# Altium PCB SoundAmplify.PcbDoc
Units mil, origin at the board's own origin, x right, y up, seen from the top; angles counter-clockwise.
Board outline 1709.68 x 3528 mil, 2 copper layers (Top Layer, Bottom Layer); 52 components, 24 nets, 143 pads, 96 vias.
Unrouted connection lines stored in the file: 43.
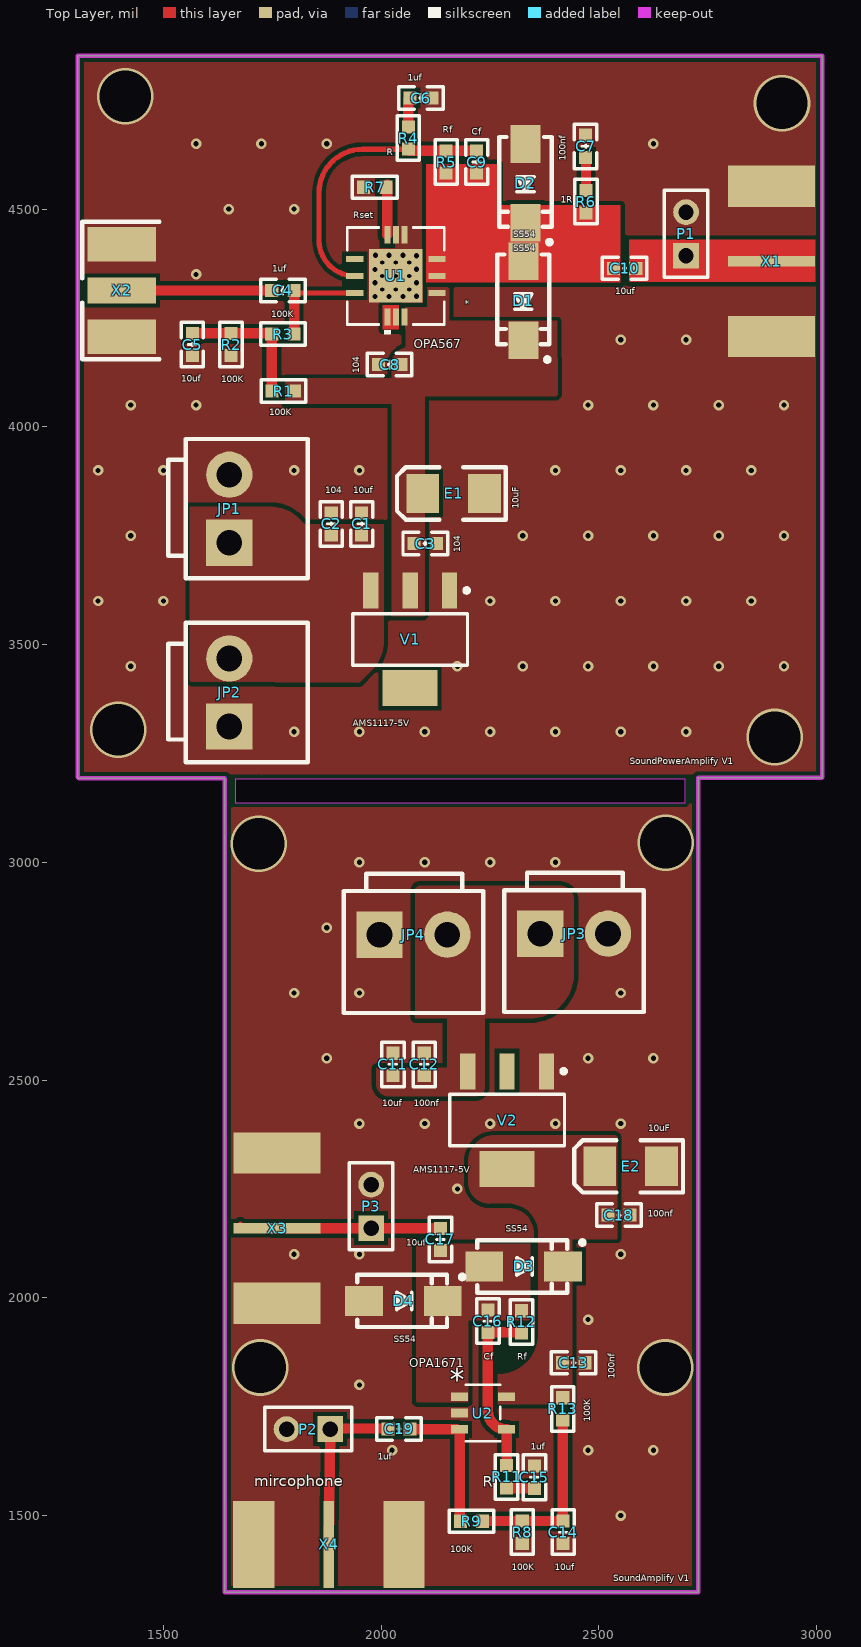
[diagram p0: Top Layer view]
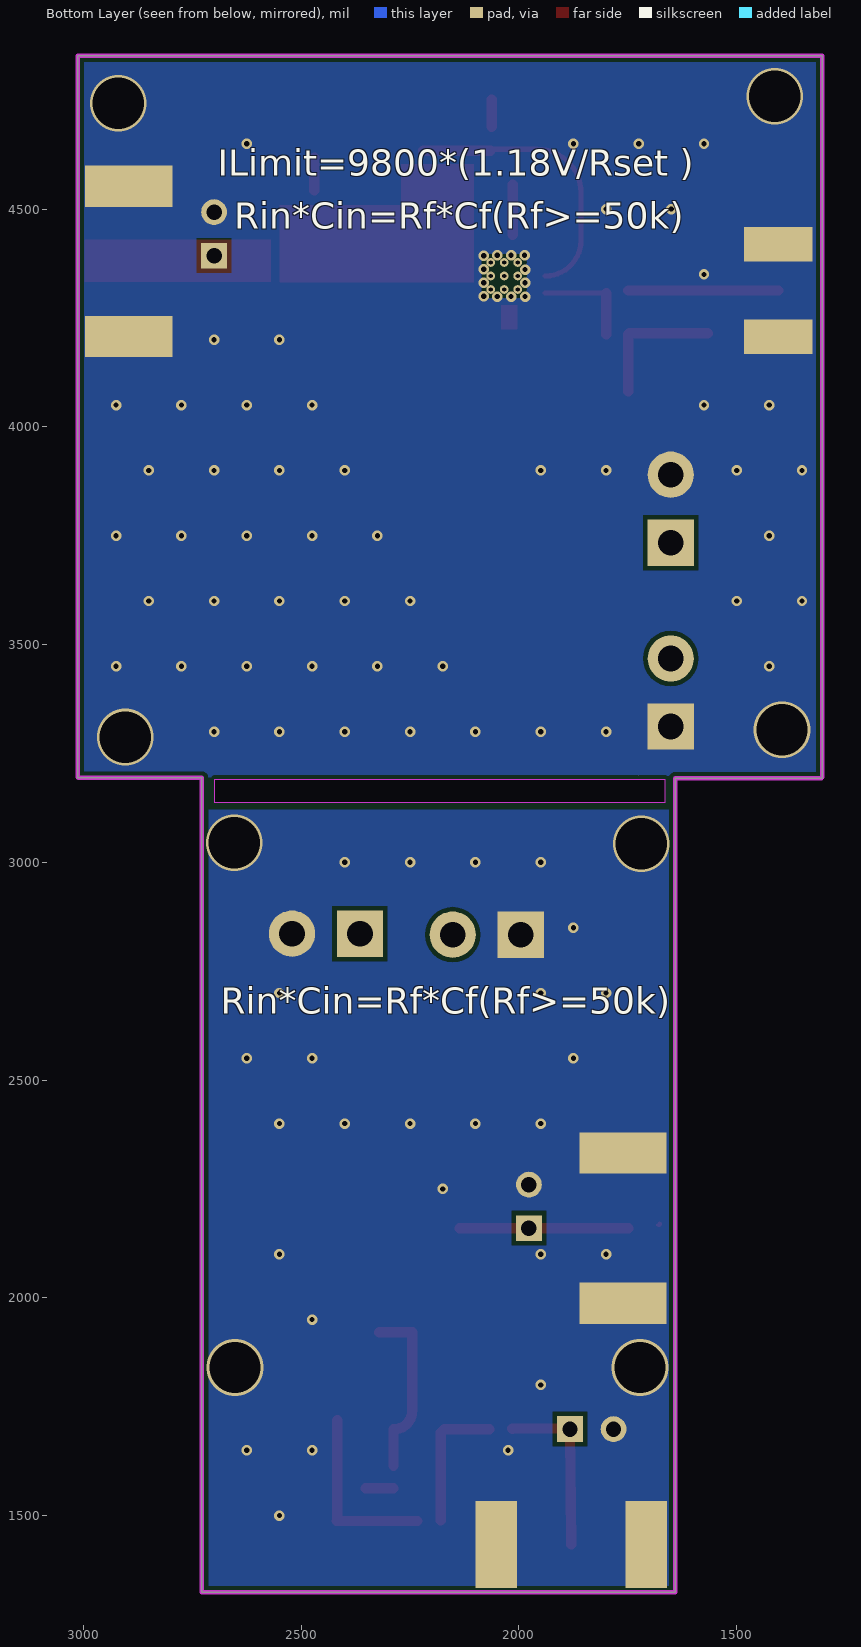
[diagram p1: Bottom Layer view, seen from below]
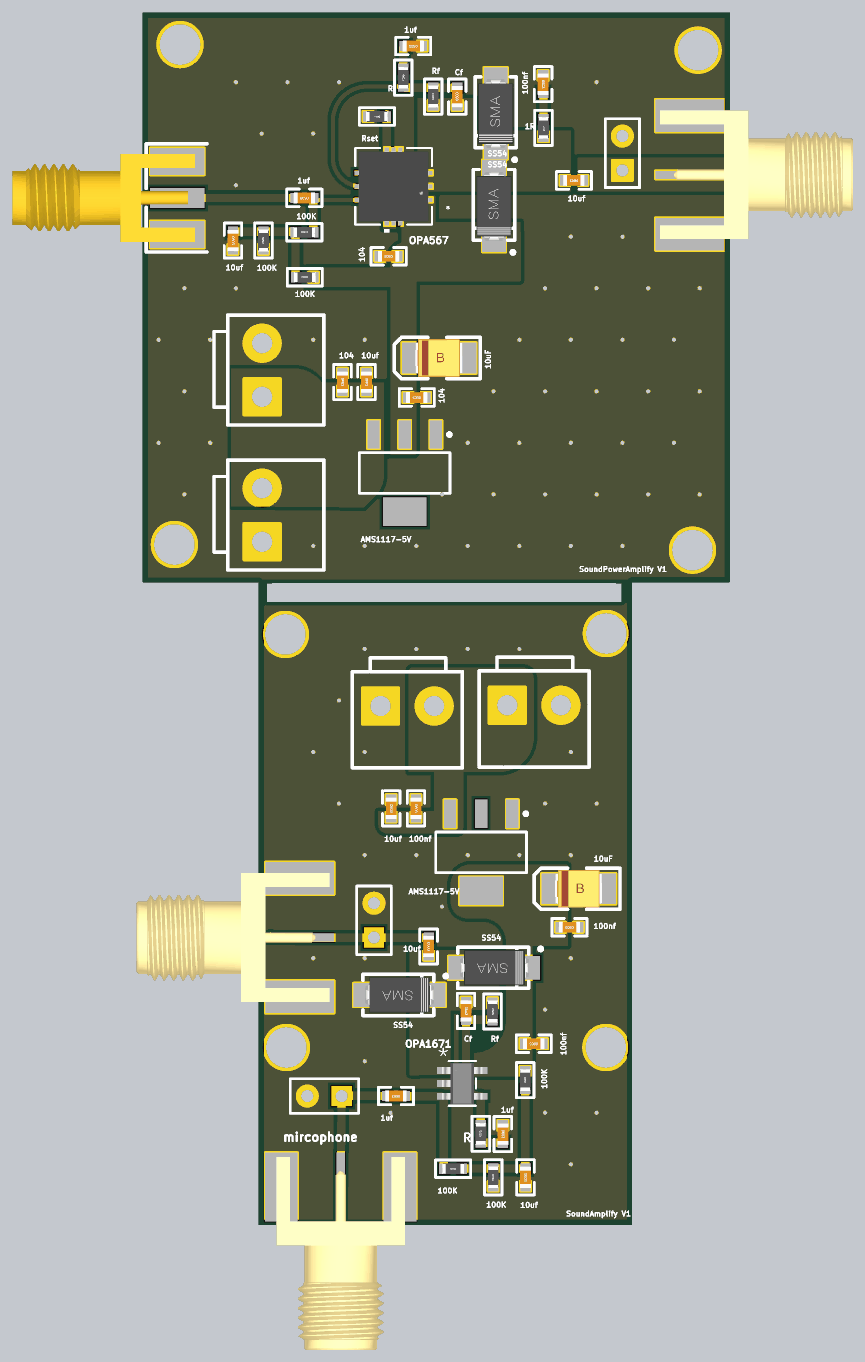
[diagram p2: 3D render of the assembled board from above, using the file's embedded part models]

## Layer stack, top to bottom
Top Solder: solder mask 0.4, Solder Resist, Dk 3.5
Top Layer: signal copper 1.4
Dielectric 1: dielectric 12.6, FR-4, Dk 4.8
Bottom Layer: signal copper 1.4
Bottom Solder: solder mask 0.4, Solder Resist, Dk 3.5

## Board outline
1641,3121 1641,3193 1305.32,3193 1303.32,3195 1303.32,4852 3013,4852 3013,3195 3012,3194 2728,3194 2728,3121 2728,1324 1641,1324
cut-out: 1665,3190.47 1665,3137 2698,3137 2698,3190.47
cut-out: 1726,3200

## Design rules (kind name [scope] priority, off if disabled: settings)
Clearance [All] p1: gap=10 ignorepadtopadclearanceinfootprint=FALSE except(0: Arc-Hole Track-Hole SMDPad-Hole THPad-Hole Via-Hole Fill-Hole Poly-Hole Region-Hole Text-Hole)
PlaneClearance [All] p1: clearance=15
PlaneConnect [All] p1: planeconnectstyle=Direct reliefexpansion=20 reliefentries=4 reliefconductorwidth=10 reliefairgap=10
PolygonConnect [All] p1: connectstyle=Direct reliefconductorwidth=10 reliefentries=4 polygonreliefangle="90 Angle" airgapwidth=10
RoutingVias [All] p1: holewidth=28 width=50 viastyle="Through Hole" minholewidth=28 minwidth=50 maxholewidth=28 maxwidth=50
SolderMaskExpansion [All] p1: expansion=4
Width [All] p1: maxlimit=10 minlimit=10 preferedwidth=10
28 further rules are at their usual default settings.

## Classes and differential pairs
component class OPA1671: C11 C12 C13 C14 C15 C16 C17 C18 C19 D3 D4 E2 JP3 JP4 P2 P3 R8 R9 R11 R12 R13 U2 V2 X3 X4
component class OPA567: C1 C2 C3 C4 C5 C6 C7 C8 C9 C10 D1 D2 E1 JP1 JP2 P1 R1 R2 R3 R4 R5 R6 R7 U1 V1 X1 X2

## Components (designator, comment, footprint, x,y, rotation, side; value= is the part's Value field where it differs from the comment)
C1 "10uf" "C 0603_L" 1955.32,3777 r270 top
C2 "104" "C 0603_L" 1885.32,3777 r270 top
C3 "104" "C 0603_L" 2101.32,3732 r180 top
C4 "1uf" "C 0603_L" 1774.32,4313 r180 top
C5 "10uf" "C 0603_L" 1566.32,4189 r270 top
C6 "1uf" "C 0603_L" 2091.32,4755 r180 top
C7 "100nf" "C 0603_L" 2469.32,4644 r270 top
C8 "104" "C 0603_L" 2019.32,4143 r180 top
C9 "Cf" "C 0603_L" 2219.32,4608 r90 top
C10 "10uf" "C 0603_L" 2559,4364 r180 top
C11 "10uf" "C 0603_L" 2027,2536 r270 top
C12 "100nf" "C 0603_L" 2099,2536 r270 top
C13 "100nf" "C 0603_L" 2442,1851 r180 top
C14 "10uf" "C 0603_L" 2418.01,1462 r270 top
C15 "1uf" "C 0603_L" 2352,1588 r270 top
C16 "Cf" "C 0603_L" 2245,1946.41 r270 top
C17 "10uf" "C 0603_L" 2136,2134 r270 top
C18 "100nf" "C 0603_L" 2546,2190 r180 top
C19 "1uf" "C 0603_L" 2041,1699 r180 top
D1 "SS54" SMA 2326.32,4289.45 r270 top
D2 "SS54" SMA 2331.32,4559 r270 top
D3 "SS54" SMA 2327,2072 r0 top
D4 "SS54" SMA 2051,1993 r0 top
E1 "10uF" "CD B(3528)" 2166.32,3847 r0 top
E2 "10uF" "CD B(3528)" 2573,2302 r0 top
JP1 "HDR-1X2" VH3.96-LI-2P 1651.32,3812 r90 top
JP2 "HDR-1X2" VH3.96-LI-2P 1651.32,3389.95 r90 top
JP3 "HDR-1X2" VH3.96-LI-2P 2442.95,2836.22 r0 top
JP4 "HDR-1X2" VH3.96-LI-2P 2073.95,2834 r0 top
P1 "Header 2" HDR1X2 2700,4393 r90 top
P2 "mircophone" HDR1X2 1882.79,1698.63 r180 top
P3 "Header 2" HDR1X2 1977,2160 r90 top
R1 "100K" "R 0603_L" 1775.32,4082 r0 top
R2 "100K" "R 0603_L" 1655.32,4189.01 r90 top
R3 "100K" "R 0603_L" 1774.33,4213 r0 top
R4 "R" "R 0603_L" 2062.32,4663 r270 top
R5 "Rf" "R 0603_L" 2149.32,4608 r90 top
R6 "1R" "R 0603_L" 2470.32,4517 r270 top
R7 "Rset" "R 0603_L" 1985.32,4550 r180 top
R8 "100K" "R 0603_L" 2324,1462 r90 top
R9 "100K" "R 0603_L" 2207.41,1487 r180 top
R11 "R" "R 0603_L" 2288,1589 r90 top
R12 "Rf" "R 0603_L" 2322,1944.82 r270 top
R13 "100K" "R 0603_L" 2417,1745 r90 top
U1 "OPA567" RHG12_3P12X3P12 2033.84,4346.37 r180 top
U2 "OPA1671" SOT23-DBV5_TEX 2233.75,1735.4 r0 top
V1 "AMS1117-5V" SOT223_L 2066.32,3512 r270 top
V2 "AMS1117-5V" SOT223_L 2289,2408 r270 top
X1 "SMA" SMA1 2896,4380 r180 top
X2 "SMA" SMA-KE 1404.32,4313 r90 top
X3 "SMA" SMA1 1761,2160 r0 top
X4 "SMA" SMA1 1880,1434 r90 top

## Footprints (in the part's own frame and the unit in brackets; to place one, negate y for a bottom-side part, rotate by r counter-clockwise, add the part's x,y. Pads: shape width x height; smd on the part's side, far side on the other; paste and mask are expansions set on the pad)
"C 0603_L" [mil] "无极性贴片电容"
  rect 30x30 smd: 1(-25.59,0) 2(25.59,0)
  silkscreen extent -51,-26 51,26, body extent -31,-16 31,16, height 32
"CD B(3528)" [mil] "长3.5mm，宽2.8mm，厚1.9mm"
  rect 75x90 smd: 1(-70.87,-0.01) 2(70.86,-0.01)
  silkscreen extent -130,-60 120,60, body extent -69,-55 69,55, height 75
HDR1X2 [mm] "Connector; Header; 2 Position"
  rect 1.5x1.5 hole 0.9: 1(0,0)
  round 1.5 hole 0.9: 2(2.54,0)
  silkscreen extent -1.27,-1.27 3.81,1.27
"R 0603_L" [mil] "1/10W贴片电阻"
  rect 30x30 smd: 1(-25.59,0) 2(25.59,0)
  silkscreen extent -51,-26 51,26, body extent -31,-16 32,16, height 16
RHG12_3P12X3P12 [mm]
  rect 1x0.35 smd paste-0.175: 1(-2.4,1) 2(-2.4,0) 3(-2.4,-1) 7(2.4,-1) 8(2.4,0) 9(2.4,1)
  rect 0.35x1 smd paste-0.175: 4(-0.5,-2.4) 5(0,-2.4) 6(0.5,-2.4) 10(0.5,2.4) 11(0,2.4) 12(-0.5,2.4)
  rect 3.12x3.12 smd paste-1.547 mask-1.549: 13(0,0)
  round 0.508 hole 0.254: V(-0.787,0.787) V(-0.787,0) V(-0.787,-0.787) V(0,0.787) V(0,0) V(0,-0.787) V(0.787,0.787) V(0.787,0) V(0.787,-0.787)
  silkscreen extent -2.83,-2.83 2.83,3.41, body extent -2.63,-2.63 2.63,2.63, height 1
SMA [mm] "4.5x2.6*2.2mm（长宽高，不包括引脚）"
  rect 2.2x1.75 smd: 1(-2.3,0) 2(2.3,0)
  silkscreen extent -2.7,-1.52 3.56,1.52, body extent -2.53,-1.3 2.58,1.3, height 2.15
SMA1 [mil]
  rect 200x24 smd: 1(0,0)
  rect 200x95 smd: 2(0,172.5) 2(0,-172.5)
  rect 200x95 smd far side: 2(0,172.5) 2(0,-172.5)
  body extent -475,-187 87,187, height 171
SMA-KE [mm] "SMA 偏脚射频天线座"
  rect 1.5x4 smd: 1(0,0)
  rect 2x4 smd: 2(-2.7,0) 2(2.7,0)
  rect 2x4 smd far side: 3(-2.7,0) 3(2.7,0)
  silkscreen extent -4,-2.2 4,2.3, body extent -3.25,-1.3 3.25,12.2, height 3.75
SOT23-DBV5_TEX [mil]
  rect 38.5x20 smd paste+0 mask+0: 1(-53.75,37.4) 2(-53.75,0) 3(-53.75,-37.4) 4(53.75,-37.4) 5(53.75,37.4)
  silkscreen extent -40,-65 40,65, body extent -59,-60 59,60, height 57
SOT223_L [mm] "SOT223, 4-Leads, Body 6.5x3.5mm, Pitch 2.3mm, Lead Span 7mm, IPC High Density"
  rect 2.1x0.9 smd: 1(-2.85,2.3) 2(-2.85,0) 3(-2.85,-2.3)
  rect 2.1x3.2 smd: 4(2.85,0)
  silkscreen extent -2.97,-3.35 1.5,3.43, body extent -1.85,-3.35 1.85,3.35, height 1.7
VH3.96-LI-2P [mm] "接插件，25V/5A"
  rect 2.7x2.7 hole 1.5: 1(-1.98,0)
  round 2.7 hole 1.5: 2(1.982,0)
  silkscreen extent -4.06,-4.57 4.07,3.56, body extent -3.98,-4.4 4.03,4.16, height 10.5

## Part data
C1 C2 C3 C4 C5 C6 C7 C8 C9 C10 C11 C12 C13 C14 C15 C16 C17 C18 C19: library part C, "无极性贴片电容", BOM名称=无极性, 学习资源=www.ooocke.
D1 D2 D3 D4: library part SR540, "肖特基二极管", BOM名称=整流, 学习资源=www.ooocke., 属性="40V  5"
E1 E2: library part C-CD, "贴片钽电容", BOM名称=贴片, 学习资源=www.ooocke.
JP1 JP2 JP3 JP4: library part "Header 2_1", "2P接插件", BOM名称=2P接, 学习资源=www.ooocke.
P1 P3: "Header, 2-Pin", LatestRevisionDate=17-Jul-2002, LatestRevisionNote="Re-released for DXP Platform.", Publisher="Altium Limited"
P2: library part "Header 2", "Header, 2-Pin", LatestRevisionDate=17-Jul-2002, LatestRevisionNote="Re-released for DXP Platform.", Publisher="Altium Limited"
R1 R2 R3 R5 R6 R7 R8 R9 R12 R13: library part R, "贴片电阻", BOM名称=ÌùÆ, 学习资源=www.ooocke.
R4 R11: "贴片电阻", BOM名称=ÌùÆ, 学习资源=www.ooocke.
U1: library part OPA567AIRHGR, "2A,5V功率放大器", Mfr_Name="Texas Instruments", Copyright="Copyright (C) 2021 Ultra Librarian. All rights reserved.", Manufacturer_Part_Number=OPA567AIRHGR, RefDes=RefDes, Type=DEV
U2: library part OPA1671IDBVR, "低噪声音频运算放大器", Mfr_Name="Texas Instruments", Copyright="Copyright (C) 2021 Ultra Librarian. All rights reserved.", Manufacturer_Part_Number=OPA1671IDBVR, RefDes=RefDes, Type=DEV
V1 V2: library part AMS1117, "三端稳压芯片", BOM名称=ÎÈÑ, 学习资源=www.ooocke.
X2: "SMA-2.4G射频天线接口", BOM名称=SMA-2.4GÉäÆµÌ, 学习资源=www.ooocke.

## Via types
v1: diameter 24, hole 12, Top Layer to Bottom Layer, tented both sides, 76 vias
v2: diameter 24, hole 12, Top Layer to Bottom Layer, 12 vias
v3: diameter 129.92, hole 118.11, Top Layer to Bottom Layer, 8 vias

## Nets (pads, with @x,y where several pads share a name; then routed paths per layer and width w, separated by ;. In a path a pad name is that pad's centre, name@x,y a point inside that pad or via, vN(x,y) a via of type N, cw(c..) or ccw(c..) an arc to the next point about the centre after c; other vN are vias at no path point)
2.+5: C13.2 C18.2 D3.2 E2.1 R13.2 U2.5 V2.4
2GND: C11.1 C12.1 C13.1 C14.2 C15.1 C18.1 D4.1 E2.2 JP3.2 JP4.1 P2.2 P3.2 R8.1 U2.2 V2.1 X3.2 X4.2
  other v1: 2550,1500 2025,1650 2475,1650 2625,1650 1950,1800 2475,1950 1800,2100 1950,2100 2550,2100 2175,2250 1950,2400 2100,2400 2250,2400 2400,2400 2550,2400 1875,2550 2475,2550 2625,2550 1800,2700 1950,2700 2550,2700 1875,2850 1950,3000 2100,3000 2250,3000 2400,3000
  other v3: 1722,1840 2652,1840 1719,3042.32 2653.32,3045
2IN+: C19.1 R9.2 U2.3 | length 321.3
  Top Layer w10: C19.1@2066.59,1697 cw(c2067.59,1697) C19.1@2067.59,1698 ; R9.2@2180,1488.82 ccw(c2181.82,1488.82) R9.2
  Top Layer w24: C19.1@2067.59,1698 2172,1698 2180,1690 R9.2@2180,1488.82
2IN-: C16.2 R11.2 R12.2 U2.4 | length 408.9
  Top Layer w10: U2.4 U2.4@2288,1698 ; R12.2@2320.41,1920.82 cw(c2320.41,1919.23) R12.2
  Top Layer w24: U2.4 cw(c2287.5,1740.5) 2245,1740.5 C16.2 R12.2@2320.41,1920.82 ; R11.2 U2.4@2288,1698
2VCC: C11.2 C12.2 JP3.1 JP4.2 V2.3
2VO: C16.1 C17.2 D3.1 D4.2 R12.1 U2.1
+5: C3.2 C8.1 D1.2 E1.1 R1.2 U1.1 U1.12 V1.2
GND: C1.1 C2.1 C3.1 C5.2 C6.1 C7.1 C8.2 D2.1 E1.2 JP1.2 JP2.1 P1.2 R2.1 R7.2 U1.4 U1.5 U1.13 V1.1 X1.2 X2.2 X2.3
  other v1: 1800,3300 1950,3300 2100,3300 2250,3300 2400,3300 2550,3300 2700,3300 1425,3450 2175,3450 2325,3450 2475,3450 2625,3450 2775,3450 2925,3450 1350,3600 1500,3600 2250,3600 2400,3600 2550,3600 2700,3600 2850,3600 1425,3750 2325,3750 2475,3750 2625,3750 2775,3750 2925,3750 1350,3900 1500,3900 1800,3900 1950,3900 2400,3900 2550,3900 2700,3900 2850,3900 1425,4050 1575,4050 2475,4050 2625,4050 2775,4050 2925,4050 2550,4200 2700,4200 1575,4350 1650,4500 1800,4500 1575,4650 1725,4650 1875,4650 2625,4650
  other v2: 1986,4299 2018,4299 2050,4299 2081,4300 1986,4331 2081,4331 1986,4361 2081,4362 2081,4393 1987,4394 2018,4394 2050,4394
  other v3: 2904,3287.68 1396,3304 2920.32,4743 1412.32,4759.32
IFLAG: U1.7
IN+: C4.1 R3.2 U1.9 | length 239.4
  Top Layer w10: C4.1@1799.92,4307 C4.1
  Top Layer w12: C4.1@1799.92,4307 U1.9
  Top Layer w24: R3.2 C4.1@1799.92,4307
IN-: C9.2 R4.2 R5.2 U1.8 | length 659.1
  Top Layer w10: R4.2 ccw(c2066.15,4637.41) R4.2@2066.15,4633.59
  Top Layer w12: U1.8 cw(c1939.35,4428.39) 1857.32,4428.39 1857.32,4537.41 cw(c1957.32,4537.41) 1957.32,4637.41 R4.2
  Top Layer w24: R4.2@2066.15,4633.59 R5.2 C9.2
ISET: R7.1 U1.6 | length 121.2
  Top Layer w10: R7.1@2014.14,4556.41 cw(c2017.73,4556.41) R7.1@2017.73,4560
  Top Layer w24: U1.6 R7.1@2014.14,4556.41
NetC4_2: C4.2 X2.1 | length 345.4
  Top Layer w10: C4.2 C4.2@1748.74,4314
  Top Layer w24: X2.1 C4.2
NetC5_1: C5.1 R1.1 R2.2 R3.1 | length 316.8
  Top Layer w10: R3.1@1747.14,4214.59 cw(c1747.14,4213) R3.1 ccw(c1747.14,4213) R3.1@1747.14,4214.59
  Top Layer w24: C5.1 R2.2 R3.1@1747.14,4214.59 ; R1.1@1748.74,4082 R3.1
NetC6_2: C6.2 R4.1 | length 68.4
  Top Layer w10: C6.2@2062.32,4751.59 cw(c2065.74,4751.59) C6.2
  Top Layer w24: R4.1 C6.2@2062.32,4751.59
NetC7_2: C7.2 R6.1 | length 76.4
  Top Layer w10: C7.2 cw(c2469.32,4617.41) C7.2@2470.32,4617.41
  Top Layer w24: R6.1 C7.2@2470.32,4617.41
NetC10_1: C10.1 P1.1 X1.1
NetC14_1: C14.1 R8.2 R9.1 R13.1 | length 418
  Top Layer w10: R9.1 R9.1@2233,1487.59 ; C14.1@2417,1488.59 ccw(c2418,1488.59) C14.1
  Top Layer w24: R9.1@2233,1487.59 C14.1 ; C14.1@2417,1488.59 R13.1
NetC15_2: C15.2 R11.1 | length 64.6
  Top Layer w10: R11.1 ccw(c2289,1563.41) R11.1@2289,1562.41
  Top Layer w24: R11.1@2289,1562.41 C15.2
NetC17_1: C17.1 P3.1 X3.1 | length 391.9
  Top Layer w10: X3.1@1676.41,2170.59 ccw(c1679.81,2170.59) X3.1@1679.81,2167.18
  Top Layer w24: X3.1@1749.41,2159.59 1752.81,2159.59 1990,2159.59 C17.1
NetC19_2: C19.2 P2.1 X4.1 | length 399.8
  Top Layer w24: X4.1 P2.1 ; P2.1@1882.59,1697.26 P2.1 ; C19.2 1883,1700 P2.1
NetU1_10: U1.10 U1.11
VCC: C1.2 C2.2 JP1.1 JP2.2 V1.3
VO: C9.1 C10.2 D1.1 D2.2 R5.1 R6.2 U1.2 U1.3
pads on no net: U1.V V1.4 V2.2

## Polygon pours and split planes (outlines as drawn)
2GND on Top Layer "Top Layer-2GND" (solid, remove dead copper, pour order 29): 1641,3137 1641,1324 2728,1324 2728,3137
2VCC on Top Layer "Top Layer-2VCC" (solid, remove dead copper, pour order 28): 1989,2528 1989,2490 ccw(c2016,2490) 2016,2463 2217,2463 ccw(c2217,2484) 2238,2484 2238,2641 cw(c2239,2641) 2239,2642 2342,2642 ccw(c2342,2742) 2442,2742 2442,2914 ccw(c2410,2914) 2410,2946 2088,2946 ccw(c2088,2936) 2078,2936 2078,2657 ccw(c2111.5,2650.5) 2078.45,2642 2152,2642 2152,2528
2.+5 on Top Layer "Top Layer-2.+5" (solid, remove dead copper, pour order 22): 2265,1824 2265,1756 2439,1756 2439,2135 2540,2135 ccw(c2540,2137) 2542,2137 2542,2370 cw(c2545,2370) 2545,2373 2259,2373 ccw(c2259,2314) 2200,2314 2200,2265 ccw(c2249,2265) 2249,2216 2293,2216 cw(c2293,2148) 2361,2148 2361,1920 cw(c2267.57,1917.43)
2VO on Top Layer "Top Layer-2VO" (solid, remove dead copper, pour order 20): 2200,1759.94 2200,1948 2342,1949.09 2342,2124 2080,2124 2080,1759
GND on Top Layer "Top Layer-GND" (solid, remove dead copper, pour order 16): 1303.32,4852 1303.32,3195 cw(c1310.32,3195) 1310.32,3202 3003,3202 3003,4852
+5 on Top Layer "Top Layer-+5" (solid, remove dead copper, pour order 10): 2405.32,4070 2074.62,4070 2074.62,4243 2403.89,4243
+5 on Top Layer "Top Layer-+5 1" (solid, remove dead copper, pour order 8): 2052.32,4274.95 cw(c2042.68,4265.3) 2056.32,4265.3 2056.32,4138 2105.32,4138 2105.32,4274.95
+5 on Top Layer "Top Layer-+5 2" (solid, remove dead copper, pour order 4): 2100.22,3565 2024.32,3565 2024.32,4140.4 cw(c2058.48,4144.65) 2036.34,4171 cw(c2068.28,4138.16) 2100.22,4171
+5 on Top Layer "Top Layer-+5 3" (solid, remove dead copper, pour order 14): 2034.32,4111 1784.32,4111 ccw(c1784.32,4107) 1780.32,4107 1780.32,4053 2034.32,4053
no net on Top Layer "Top Layer-No Net" (solid, remove dead copper, pour order 12): 1783.32,4125
+5 on Top Layer "Top Layer-+5 4" (solid, remove dead copper, pour order 6): 2054.74,4225 2156.32,4225 2156.32,4313.47 ccw(c2150.89,4314.97) 2148.73,4320.17 2104.32,4320.17 2104.32,4289.07 cw(c2087.26,4289.07) 2099.32,4277 cw(c2096.91,4279.41) 2096.91,4276 2054.74,4276
VCC on Top Layer "Top Layer-VCC" (solid, remove dead copper, pour order 2): 1562.32,3415 cw(c1567.15,3419.83) 1560.32,3419.83 1560.32,3817 1742.9,3817 cw(c1742.9,3717) 1813.61,3787.71 1821.32,3780 ccw(c1830.98,3789.66) 1830.98,3776 2006.32,3776 2006.32,3510.62 cw(c1906.33,3510.42) 1977.03,3439.71 1949.32,3412
2GND on Bottom Layer "Bottom Layer-2GND" (solid, remove dead copper, pour order 31): 1641,3121 2728,3121 2728,1324 1641,1324
GND on Bottom Layer "Bottom Layer-GND" (solid, remove dead copper, pour order 18): 1303.32,4852 1303.32,3195 3002,3195 3002,4852
no net on Top Overlay (solid, remove dead copper): 1641,3121

## Keep-outs
Keep-Out Layer:
  lines w10: 1303.32,3195 1303.32,4852 3013,4852 3013,3195 ; 1305.32,3193 1641,3193 1641,3121 1641,1324 2728,1324 2728,3121 2728,3194 3012,3194

## Other copper
Top Layer:
  rectangle net VO: 2103.32,4499 2270.32,4604
  rectangle net VO: 2103.32,4331 2550,4509
  rectangle net NetC10_1: 2569,4332 2997,4430
  rectangle net NetU1_10: 2003.32,4223 2041.32,4280
  pour cut-out: 1909,4403 1909,4291 1967,4291 1969,4289 1969,4403

## Silkscreen, mask and mechanical layers (free items; w line width, h text height)
Top Overlay:
  text "SoundPowerAmplify V1" at 2571,3225 h15
  text "SoundAmplify V1" at 2533,1349 h15
Bottom Overlay:
  text "ILimit=9800*(1.18V/Rset )" at 2691,4577 h60
  text "Rin*Cin=Rf*Cf(Rf>=50k)" at 2654,4455 h60
  text "Rin*Cin=Rf*Cf(Rf>=50k)" at 2685,2652 h60

## Text inside footprints (layer, text, board x,y; h text height)
U1: Top Overlay "*" at 2201.84,4296.37 h15 r180; Mechanical 13 "*" at 2201.84,4296.37 h15 r180
U2: Top Overlay "*" at 2157.5,1787.8 h50; Mechanical 13 "*" at 2196.75,1744.8 h50